# Altium PCB ProjectLOOM.PcbDoc
Units mm, origin at the board's own origin, x right, y up, seen from the top; angles counter-clockwise.
Board outline 50.8 x 58.42 mm, 2 copper layers (Top Layer, Bottom Layer), stack 1.671 mm thick; 16 components, 12 nets, 78 pads, 7 vias.
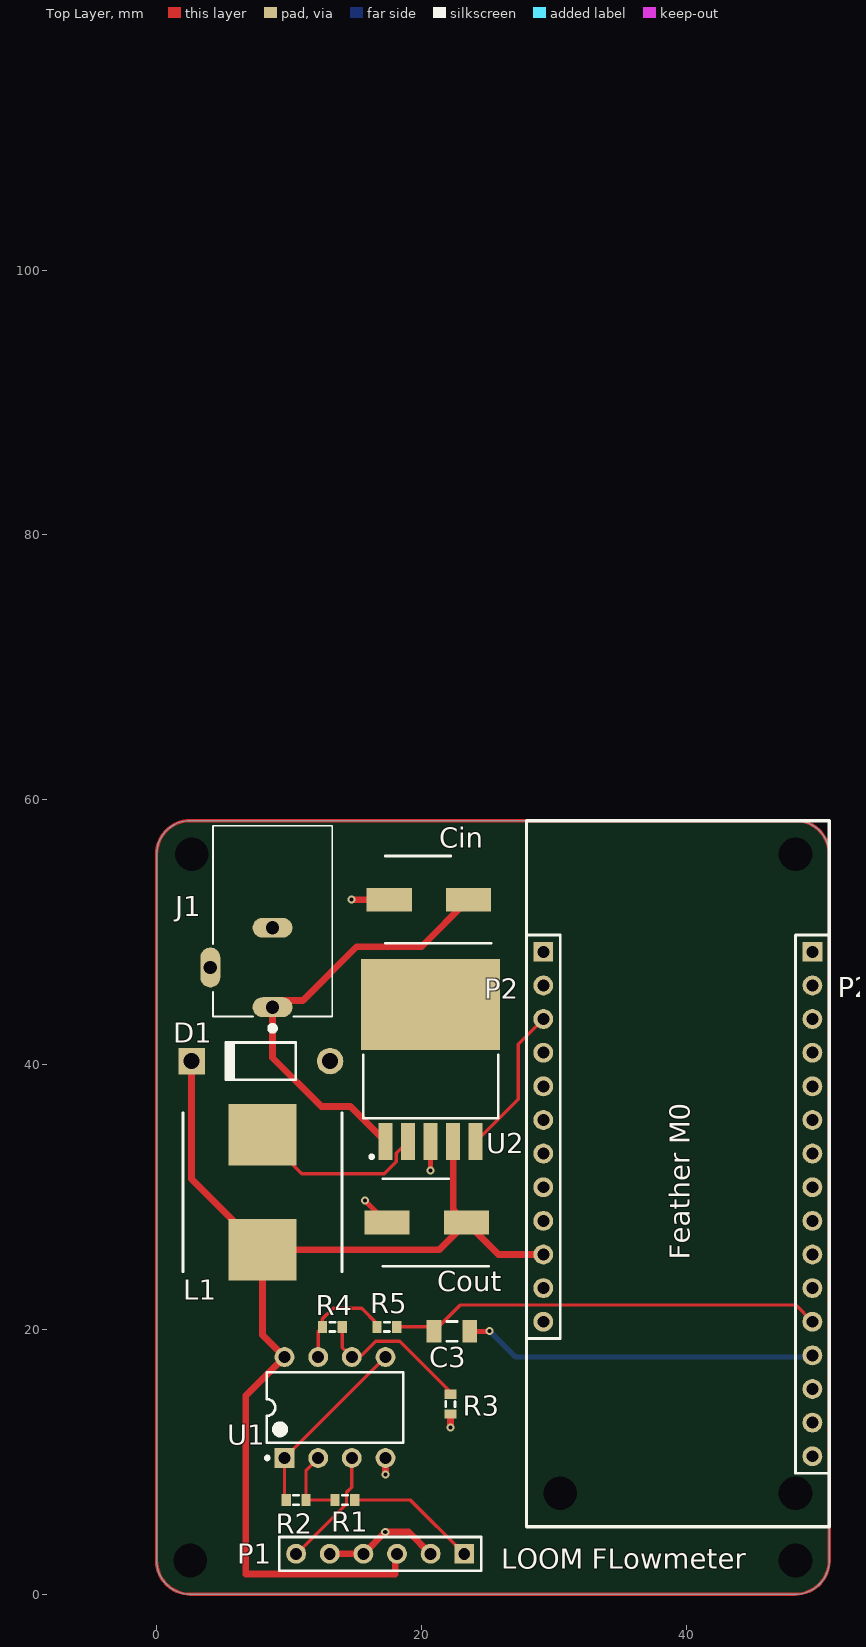
[diagram p0: Top Layer view]
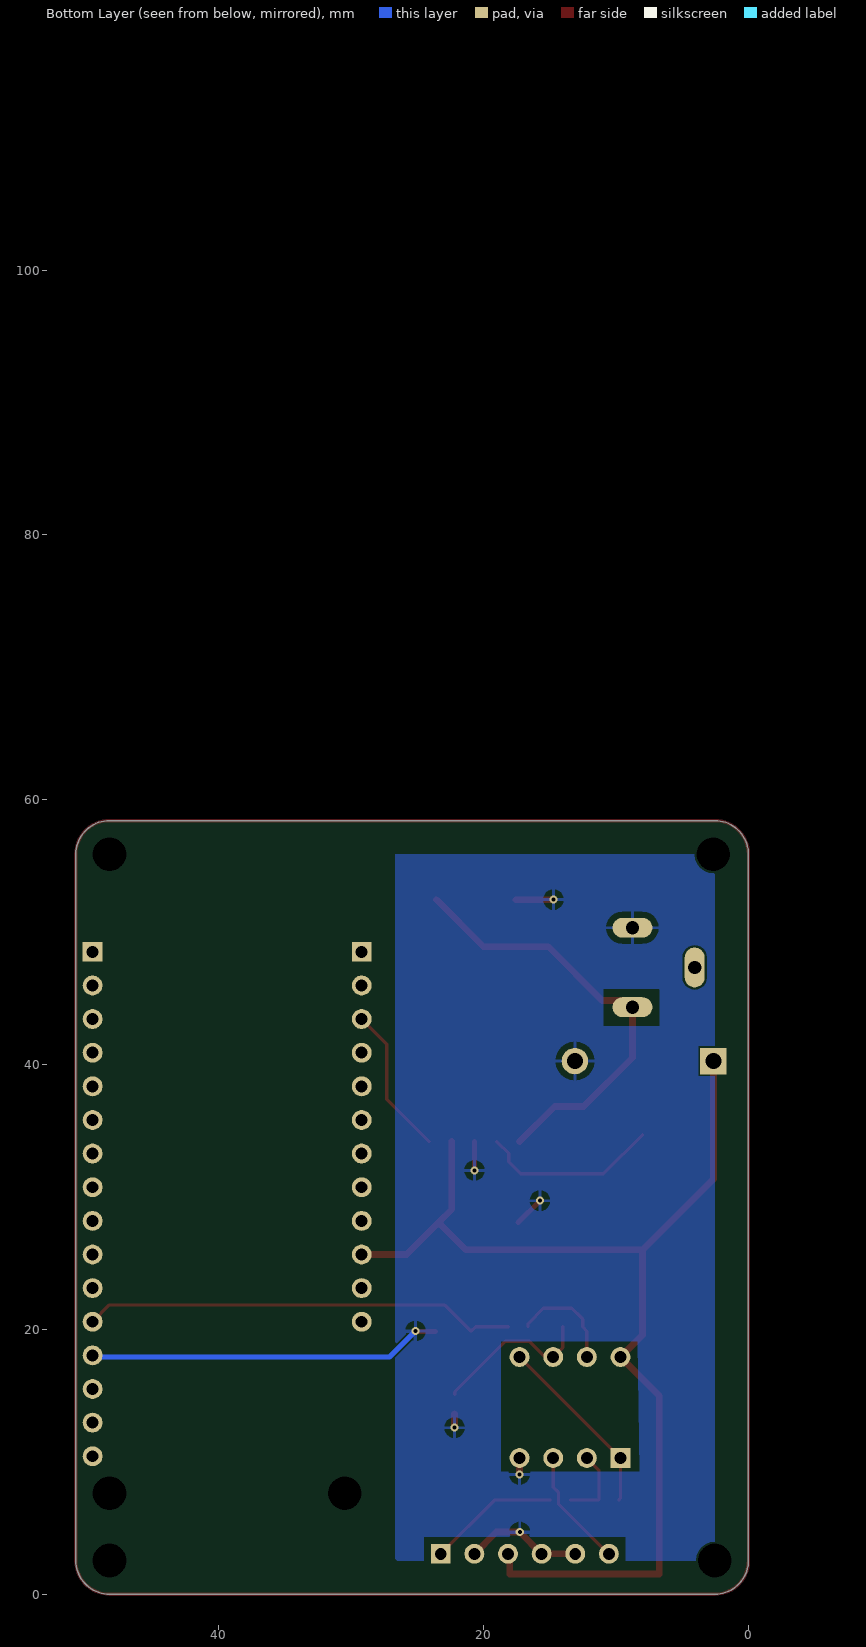
[diagram p1: Bottom Layer view, seen from below]

## Layer stack, top to bottom
Top Solder: solder mask 0.0102, Solder Resist, Dk 3.5
Top Layer: signal copper 0.0356
Dielectric 1: dielectric 1.6, FR-4, Dk 4.8
Bottom Layer: signal copper 0.0356
Bottom Solder: solder mask 0.0102, Solder Resist, Dk 3.5

## Board outline
0,2.54 0,55.88 cw(c2.54,55.88) 2.54,58.42 48.26,58.42 cw(c48.26,55.88) 50.8,55.88 50.8,2.54 cw(c48.26,2.54) 48.26,0 2.54,0 cw(c2.54,2.54)

## Design rules (kind name [scope] priority, off if disabled: settings)
Clearance [IsVia vs IsPolygon] p1: gap=0.254 ignorepadtopadclearanceinfootprint=TRUE
Clearance All [All] p2: gap=0.152 ignorepadtopadclearanceinfootprint=FALSE
Clearance Polygon [InPolygon] p3: gap=0.254 ignorepadtopadclearanceinfootprint=FALSE
PolygonConnect [All] p1: connectstyle=Relief reliefconductorwidth=0.254 reliefentries=4 polygonreliefangle="90 Angle" airgapwidth=0.457
RoutingVias [All] p1: holewidth=0.305 width=0.61 viastyle="Through Hole" minholewidth=0.305 minwidth=0.61 maxholewidth=0.305 maxwidth=0.61
SilkToSilkClearance [All] p1: silktosilkclearance=0.051
SilkToSolderMaskClearance [IsPad] p1: minsilkscreentomaskgap=0.051 clearancetoexposedcopper=TRUE
SolderMaskExpansion [All] p1: expansion=0.064
Width [InNetClass('PWR')] p1: maxlimit=1.524 minlimit=0.254 preferedwidth=0.381
Width Gen_Width [All] p2: maxlimit=0.254 minlimit=0.254 preferedwidth=0.254
28 further rules are at their usual default settings.

## Classes and differential pairs
net class PWR: GND Vcc Vin
component class ProjectLOOM: C3 Cin Cout D1 J1 L1 P1 P2 R1 R2 R3 R4 R5 U1 U2

## Components (designator, comment, footprint, x,y, rotation, side; value= is the part's Value field where it differs from the comment)
C3 "Cap Semi" C1206 22.305,19.843 r180 top value=4.7uF
Cin "100uF" CAPAE660X800N 20.574,52.451 r180 top
Cout "330uF" CAPAE660X800N 20.401,28.067 r180 top
D1 "1N5817" DO-41 7.874,40.259 r180 top
J1 "PJ-102AH" CUI_PJ-102AH 8.763,50.831 r90 top
L1 "330uH" INDPM120120X805N 8.001,30.353 r90 top
P1 "Header 6" HDR1X6 23.241,3.048 r180 top
P2 "Header 12" HDR1X12 29.21,48.514 r270 top
P2 "Header 16" HDR1X16 49.53,48.514 r270 top
R1 "Res3" J1-0603 14.224,7.112 r180 top value=2K
R2 "Res3" J1-0603 10.541,7.112 r180 top value=10K
R3 "Res3" J1-0603 22.193,14.351 r90 top value=180
R4 "Res3" J1-0603 13.277,20.193 r180 top value=10K
R5 "Res3" J1-0603 17.399,20.185 r0 top value=1K
U1 "LMC6032IN" N08E 13.477,14.097 r90 top
U2 "LM2575S-5.0_NOPB" TO170P1435X465-6N 20.701,40.386 r90 top

## Footprints (in the part's own frame and the unit in brackets; to place one, negate y for a bottom-side part, rotate by r counter-clockwise, add the part's x,y. Pads: shape width x height; smd on the part's side, far side on the other; paste and mask are expansions set on the pad)
C1206 [mm] "Chip Capacitor, Body 3.2x1.6mm, IPC High Density"
  rect 1.1x1.7 smd: 1(-1.35,0) 2(1.35,0)
  silkscreen extent -0.4,-0.75 0.4,0.75, body extent -1.7,-0.9 1.7,0.9, height 1.3
CAPAE660X800N [mm]
  rect 3.4x1.8 smd: 1(-3,0) 2(3,0)
  silkscreen extent -4.7,-3.3 3.3,3.3
CUI_PJ-102AH [mm]
  oval 1.508x3.016 hole 1: 1(-6.5,0) 2(-0.5,0)
  oval 3.016x1.508 hole 1: 3(-3.5,4.7)
  silkscreen extent -8.3,-4.5 7.2,4.5
DO-41 [mm] "Diode, Axial; Body 5.2 x 2.7 mm (LxDia. max), Lead Dia. 0.86 mm (max)"
  round 2 hole 1.2: 1(-5.23,0)
  rect 2x2 hole 1.2: 2(5.23,0)
  silkscreen extent -2.65,-1.4 2.75,1.4
HDR1X6 [mm] "Connector; Header; 6 Position"
  rect 1.5x1.5 hole 0.9: 1(0,0)
  round 1.5 hole 0.9: 2(2.54,0) 3(5.08,0) 4(7.62,0) 5(10.16,0) 6(12.7,0)
  silkscreen extent -1.27,-1.27 13.97,1.27
HDR1X12 [mm] "Connector; Header; 12 Position"
  rect 1.5x1.5 hole 0.9: 1(0,0)
  round 1.5 hole 0.9: 2(2.54,0) 3(5.08,0) 4(7.62,0) 5(10.16,0) 6(12.7,0) 7(15.24,0) 8(17.78,0) 9(20.32,0) 10(22.86,0) 11(25.4,0) 12(27.94,0)
  silkscreen extent -1.27,-1.27 29.21,1.27
HDR1X16 [mm] "Connector; Header; 16 Position"
  rect 1.5x1.5 hole 0.9: 1(0,0)
  round 1.5 hole 0.9: 2(2.54,0) 3(5.08,0) 4(7.62,0) 5(10.16,0) 6(12.7,0) 7(15.24,0) 8(17.78,0) 9(20.32,0) 10(22.86,0) 11(25.4,0) 12(27.94,0) 13(30.48,0) 14(33.02,0) 15(35.56,0) 16(38.1,0)
  silkscreen extent -1.27,-1.27 39.37,1.27
INDPM120120X805N [mm]
  rect 4.65x5.1 smd: 1(-4.35,0) 2(4.35,0)
  silkscreen extent -6,-6 6,6
J1-0603 [mm] "Chip Resistor, Body 1.6x0.8mm, IPC High Density"
  rect 0.7x0.9 smd: 1(-0.75,0) 2(0.75,0)
  silkscreen extent -0.2,-0.35 0.2,0.35, body extent -0.85,-0.48 0.85,0.48, height 0.9
N08E [mm] "DIP, 8-Pin, Row Spacing 7.62 mm, Pitch 2.54 mm"
  rect 1.5x1.5 hole 0.9: 1(-3.81,3.81)
  round 1.5 hole 0.9: 2(-3.81,1.27) 3(-3.81,-1.27) 4(-3.81,-3.81) 5(3.81,-3.81) 6(3.81,-1.27) 7(3.81,1.27) 8(3.81,3.81)
  silkscreen extent -3.93,-5.15 2.65,5.23, body extent -3.6,-5.15 3.6,5.15, height 5.34
TO170P1435X465-6N [mm]
  rect 2.8x1.05 smd: 1(-6.2,3.4) 2(-6.2,1.7) 3(-6.2,0) 4(-6.2,-1.7) 5(-6.2,-3.4)
  rect 6.85x10.5 smd: 6(4.15,0)
  silkscreen extent -7.47,-5.1 0.35,5.1

## Part data
C3: "Capacitor (Semiconductor SIM Model)", LatestRevisionDate=29-May-2009, LatestRevisionNote="IPC-7351 Footprint Added.", PackageDescription="Chip Capacitor", PackageReference=C1206, Published=8-Jun-2000, Publisher="Altium Limited"
Cin Cout: library part EEH-ZC1E101XV, "Aluminum Organic Polymer Capacitors 25VDC 100uF 125degC VibeProof AEC-Q200", Manufacturer_Name=Panasonic, Mouser Part Number=667-EEH-ZC1E101XV, Datasheet Link=https://industrial.panasonic.com/cdbs/www-data/pdf/RDD0000/ABA0000C1234.pdf, Geometry.Height=8mm, Manufacturer_Part_Number=EEH-ZC1E101XV, Mouser Price/Stock=https://www.mouser.com/Search/Refine.aspx?Keyword=667-EEH-ZC1E101XV
D1: library part "Diode 1N4001", "1 Amp General Purpose Rectifier", Code_JEDEC=DO-204-AL, ComponentLink1Description="Manufacturer Link", ComponentLink1URL=http://www.fairchildsemi.com/, ComponentLink2Description=Datasheet, ComponentLink2URL=http://www.fairchildsemi.com/ds/1N%2F1N4001.pdf, DatasheetVersion=1998, LatestRevisionDate=17-Jul-2002, LatestRevisionNote="Re-released for DXP Platform.", PackageDescription="Diode, Axial; Body 5.2 x 2.7 mm (LxDia. max), Lead Dia. 0.86 mm (max)", PackageReference=DO-41, PackageVersion=Aug-1999, Published=8-Jun-2000, Publisher="Altium Limited"
J1: "2.0 mm Center Pin, 5.0 A, Right Angle, Through Hole, Tapered Pins, Dc Power Jack Connector", Package=None, Availability=Unavailable, CUI_purchase_URL=https://www.cui.com/product/interconnect/dc-power-connectors/jacks/2.0-mm-center-pin/pj-102ah?utm_source=snapeda.com&utm_medium=referral&utm_campaign=snapedaBOM, MF="CUI Inc.", MP=PJ-102AH, Price=None, SnapEDA_Link=https://www.snapeda.com/parts/PJ-102AH/CUI%20Inc./view-part/?ref=snap
L1: library part MSS1278T-334KLD, "COILCRAFT - MSS1278T-334KLD - INDUCTOR, 330UH, 1A, 10%,2.9MHZ, REEL", Manufacturer_Name=COILCRAFT, Mouser Part Number=994-MSS1278T-334KLD, Datasheet Link=https://componentsearchengine.com/Datasheets/1/MSS1278T-334KLD.pdf, Geometry.Height=8.05mm, Manufacturer_Part_Number=MSS1278T-334KLD
P1: "Header, 6-Pin", LatestRevisionDate=17-Jul-2002, LatestRevisionNote="Re-released for DXP Platform.", Publisher="Altium Limited"
P2: "Header, 12-Pin", LatestRevisionDate=17-Jul-2002, LatestRevisionNote="Re-released for DXP Platform.", Publisher="Altium Limited"
P2: "Header, 16-Pin", LatestRevisionDate=17-Jul-2002, LatestRevisionNote="Re-released for DXP Platform.", Publisher="Altium Limited"
R1 R2 R3 R4 R5: "Resistor", LatestRevisionDate=29-May-2009, LatestRevisionNote="IPC-7351 Footprint Added.", PackageDescription="Chip Resistor", PackageReference=J1-0603, Published=8-Jun-2000, Publisher="Altium Limited"
U1: "CMOS Dual Operational Amplifier, 8-pin MDIP", Manufacturer="National Semiconductor", PackageTopMarking=NSUZXYTTE#*LMC*6032IN, PowerWise=N, Code_JEDEC=MS-001-BA, ComponentLink1Description="Manufacturer URL", ComponentLink1URL=http://www.national.com/, ComponentLink2Description="LMC6032 Datasheet", ComponentLink2URL=http://www.national.com/ds/LM/LMC6032.pdf, ComponentLink3Description="LMC6032 Web Page", ComponentLink3URL=http://www.national.com/pf/LM/LMC6032.html, ComponentLink4Description="N08E Package Page", ComponentLink4URL=http://www.national.com/packaging/folders/n08e.html, CompType=Amplifiers, DatasheetVersion=Aug-2000, High-Reliability=Y, PackageDescription="MDIP, .365 x .250 x .130in, 8 Lead, .100in Pitch", PackageReference=N08E, PackageVersion="revG, May-2006", PartNumber=LMC6032IN, PinCount=8, RoHS=N
U2: "SIMPLE SWITCHER 1A Step-Down Voltage Regulator", Manufacturer_Name="Texas Instruments", Manufacturer_Part_Number=LM2575S-5.0/NOPB, Mouser Part Number=926-LM2575S-5.0/NOPB, Geometry.Height=4.65mm

## Free pads (board coordinates)
  round 1.524 hole 2.54 unplated: 1(-4.826,115.062) 1(2.54,2.54) 1(2.667,55.88) 1(30.48,7.62) 1(48.26,2.54) 1(48.26,7.62) 1(48.26,55.88)

## Via types
v1: diameter 0.61, hole 0.305, Top Layer to Bottom Layer, 7 vias

## Nets (pads, with @x,y where several pads share a name; then routed paths per layer and width w, separated by ;. In a path a pad name is that pad's centre, name@x,y a point inside that pad or via, vN(x,y) a via of type N, cw(c..) or ccw(c..) an arc to the next point about the centre after c; other vN are vias at no path point)
GND: C3.1 Cin.2 Cout.2 D1.1 J1.2 P1.2 P1.4 P1.5 P2.13 R3.1 U1.4 U2.3 | length 45.5
  Top Layer w0.381: v1(15.751,29.717) Cout.2 ; v1(20.701,32.004) U2.3 ; C3.1 25.116,19.843 v1(25.146,19.873)
  Top Layer w0.508: P1.5 P1.4 v1(17.272,4.699) 19.05,4.699 P1.2 ; v1(14.732,52.451) Cin.2 ; v1(17.287,9.031) U1.4 ; v1(22.193,12.573) R3.1
  Bottom Layer w0.381: J1.2@8.382,50.681 J1.2@8.382,50.831 ; v1(25.146,19.873) 27.112,17.907 49.403,17.907 P2.13
NetC3_2: C3.2 P2.12@49.53,20.574 R5.2 | length 32.9
  Top Layer w0.254: R5.2 20.613,20.185 C3.2 22.956,21.844 48.26,21.844 P2.12@49.53,20.574
NetL1_2: L1.2 U2.2 | length 13.6
  Top Layer w0.254: L1.2 10.954,31.75 17.185,31.75 18.105,32.67 18.105,33.29 U2.2
NetP1_1: P1.1 R1.1 | length 10
  Top Layer w0.254: R1.1 19.177,7.112 P1.1
NetP1_6: P1.6 U1.3 | length 9
  Top Layer w0.254: P1.6 10.605,3.048 14.345,6.787 14.345,7.678 14.747,8.08 U1.3
NetP2_3: P2.3@29.21,43.434 U2.5 | length 11.4
  Top Layer w0.254: U2.5 27.305,37.39 27.305,41.529 P2.3@29.21,43.434
NetR1_2: R1.2 R2.1 U1.2 | length 5.7
  Top Layer w0.254: U1.2 11.291,9.371 R2.1 R1.2
NetR2_2: R2.2 U1.1 U1.5 | length 14
  Top Layer w0.254: R2.2 9.667,7.236 U1.1 U1.5
NetR3_2: R3.2 R4.1 U1.6 | length 12.3
  Top Layer w0.254: R4.1 14.027,18.627 U1.6 15.363,17.907 16.549,19.093 18.371,19.093 22.193,15.271 R3.2
NetR4_2: R4.2 R5.1 U1.7 | length 8.2
  Top Layer w0.254: U1.7 12.207,19.873 R4.2 12.527,20.782 13.335,21.59 15.494,21.59 16.649,20.435 R5.1
Vcc: Cout.1 D1.2 L1.1 P1.3 P2.10@29.21,25.654 U1.8 U2.4 | length 85.3
  Top Layer w0.508: D1.2 2.644,31.36 L1.1 ; P1.3 18.034,2.921 18.034,1.524 6.731,1.524 6.731,14.971 U1.8 8.001,19.573 L1.1 ; U2.4 22.401,29.067 Cout.1 ; P2.10@29.21,25.654 25.814,25.654 Cout.1 ; L1.1 21.337,26.003 Cout.1
Vin: Cin.1 J1.1 U2.1 | length 33.3
  Top Layer w0.508: J1.1@8.382,44.831 11.049,44.831 15.113,48.895 20.018,48.895 Cin.1 ; J1.1 8.763,40.513 12.446,36.83 14.634,36.83 17.278,34.186 U2.1
pads on no net: J1.3 P2.1 P2.2 P2.3@49.53,43.434 P2.4 P2.5 P2.6 P2.7 P2.8 P2.9 P2.10@49.53,25.654 P2.11 P2.12@29.21,20.574 P2.14 P2.15 P2.16 U2.6
copper on no net: | length 214.1
  Top Layer w0.254: 0,2.54 ccw(c2.54,2.54) 2.54,0 48.26,0 ccw(c48.26,2.54) 50.8,2.54 50.8,55.88 ccw(c48.26,55.88) 48.26,58.42 2.54,58.42 ccw(c2.54,55.88) 0,55.88 0,2.54

## Polygon pours and split planes (outlines as drawn)
GND on Bottom Layer (solid, pour order 40): 2.667,55.88 2.54,55.753 2.54,2.54 26.543,2.54 26.67,2.667 26.67,55.88
no net on Bottom Layer (solid, pour order 38): 2.667,55.88
no net on Bottom Layer (solid, pour order 34): 39.624,-9.779
GND on Bottom Layer "Bottom Layer-GND 1" (solid, pour order 32): -12.319,35.433
GND on Bottom Layer "Bottom Layer-GND" (solid, pour order 28): 57.277,17.272

## Other copper
Top Layer:
  pour cut-out: 2.54,41.783 4.318,41.783 4.318,38.735 2.54,38.735
Bottom Layer:
  pour cut-out: 9.271,4.318 24.48,4.318 24.511,4.287 24.511,1.778 9.271,1.778
  pour cut-out: 6.731,45.663 6.762,45.694 10.922,45.694 10.922,42.926 6.731,42.926
  pour cut-out: 8.382,19.05 18.661,19.05 18.669,19.042 18.669,9.271 8.255,9.271

## Silkscreen, mask and mechanical layers (free items; w line width, h text height)
Top Overlay:
  lines w0.254: 27.94,5.08 50.8,5.08 50.8,58.42 27.94,58.42 27.94,5.08
  text "Feather M0" at 40.259,25.273 h1.52 r90
  text "LOOM FLowmeter" at 26.035,1.905 h1.52
Drill Drawing:
  lines w0.254: -1.508,1.524 -1,0 ; -1.508,56.896 -1,58.42 ; -1.254,0 -0.746,0 ; -1.254,58.42 -0.746,58.42 ; -1,21.948 -1,0 ; -1,36.472 -1,58.42 ; -0.492,1.524 -1,0 ; -0.492,56.896 -1,58.42 ; 0,-1.254 0,-0.746 ; 1.524,-1.508 0,-1 ; 1.524,-0.492 0,-1 ; 18.9,-1 0,-1 ; 31.9,-1 50.8,-1 ; 49.276,-1.508 50.8,-1 ; 49.276,-0.492 50.8,-1 ; 50.8,-1.254 50.8,-0.746
  text "58.42 (mm)" at -0.086,22.202 h1.52 r90
  text "50.8 (mm)" at 19.154,-1.914 h1.52